# EAGLE board AAA_source-all_on_top (EAGLE 7.2.0)
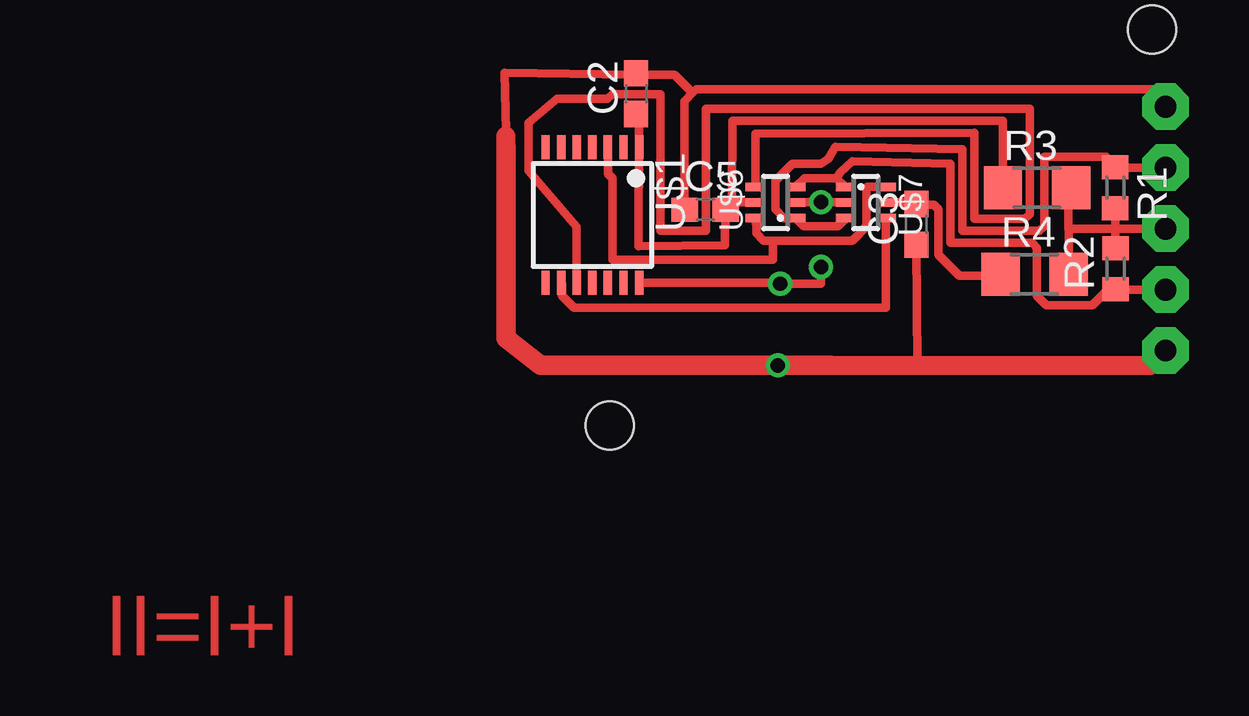
[diagram p0: board, top side]
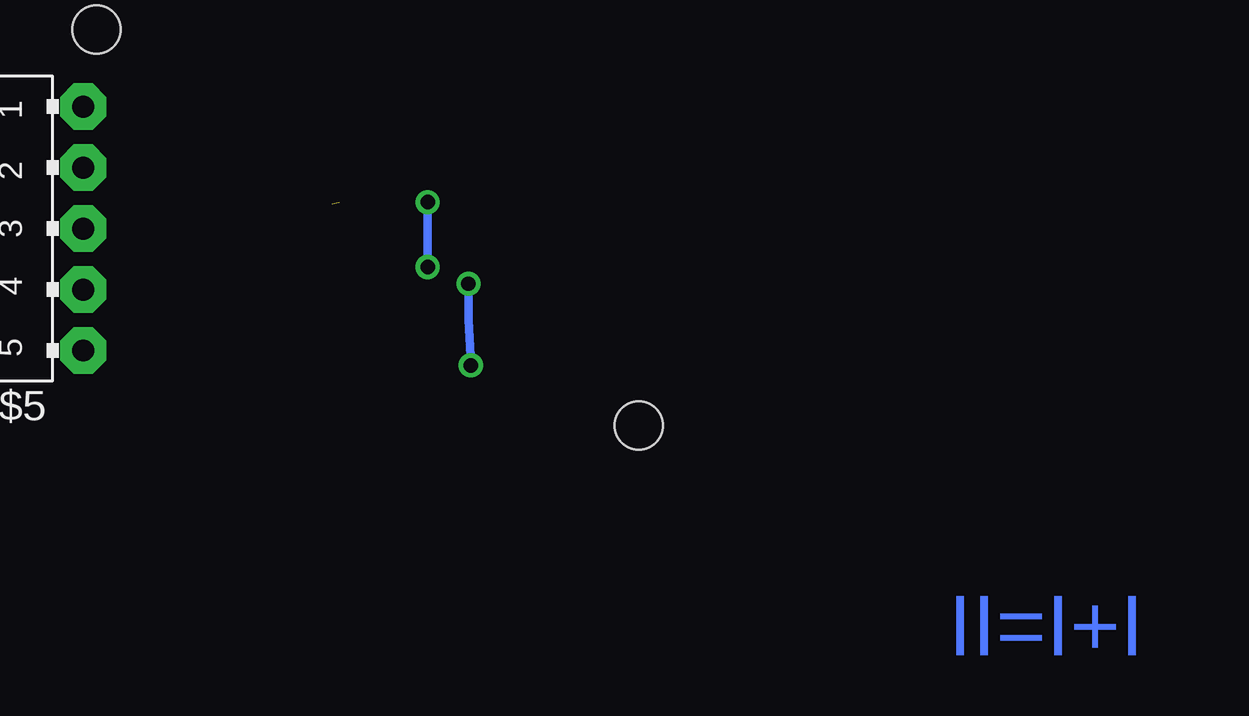
[diagram p1: board, bottom side, seen from below]

No outline drawn. Coordinates in mm, seen from the top.
Copper layers (1*16): Top 0.035mm / dielectric 1.5mm / Bottom 0.035mm
Design rules "default": minimum track width 10mil, minimum drill 24mil, track to track 8mil, track to pad 8mil, pad to pad 8mil, via to via 8mil, smd to smd 8mil, copper to edge 40mil, drill to drill 8mil, minimum pad ring 10mil, minimum via ring 8mil, stop-mask expansion 4mil, vias tented up to drill 0mil, thermal gap 10mil
Holes 2 mm at 21.9,2.3 44.5,18.8

## Footprints (pad centres in the part's own frame; a part is rotated, then mirrored left to right if it is on the bottom)
C0603 = smd 1.1 x 1: 1 -0.85,0; 2 0.85,0
R0603 = smd 1 x 1.1: 1 -0.85,0; 2 0.85,0
R1206 = smd 1.6 x 1.803: 1 -1.422,0; 2 1.422,0
TSSOP14 = smd 0.35 x 1: 1 -1.95,-2.825; 2 -1.3,-2.825; 3 -0.65,-2.825; 4 0,-2.825; 5 0.65,-2.825; 6 1.3,-2.825; 7 1.95,-2.825; 8 1.95,2.825; 9 1.3,2.825; 10 0.65,2.825; 11 0,2.825; 12 -0.65,2.825; 13 -1.3,2.825; 14 -1.95,2.825
JUMPER5F-90 = drill 0.914 pad 1.93 octagon: 1 5.08,-2.54; 2 2.54,-2.54; 3 0,-2.54; 4 -2.54,-2.54; 5 -5.08,-2.54
SC70-6L = smd 0.35 x 0.8: 1 -0.65,-0.85; 2 0,-0.85; 3 0.65,-0.85; 4 0.65,0.85; 5 0,0.85; 6 -0.65,0.85

## Placement (x,y rotation side)
C2  100nF  [C0603]  23,16.12 90 top
C3  100nF  [C0603]  34.67,10.68 90 top
C5  100nF  [C0603]  25.88,11.29 0 top
R1  4k7  [R0603]  42.96,12.2 270 top
R2  4k7  [R0603]  42.98,8.83 90 top
R3  [R1206]  39.7,12.2 0 top
R4  [R1206]  39.6,8.6 0 top
U$1  16F103-TSSOP  [TSSOP14]  21.17,11.06 180 top
U$5  JUMPER5F-90  [JUMPER5F-90]  47.6,10.5 90 bottom
U$6  NC7SB3157P6X  [SC70-6L]  28.81,11.59 90 top
U$7  NC7SB3157P6X  [SC70-6L]  32.56,11.59 270 top

## Library data of the parts
C2 C3 C5 R1-R4 = resistor
U$1 U$5-U$7 = !stavebnice03

## Nets
GND: C2.2 C3.1 C5.1 U$1.14 U$5.1 U$5.5 U$6.2 U$7.2
N$1: U$1.3 U$6.6 U$7.6
N$2: C2.1 C5.2 R3.1 U$1.1 U$6.5
N$3: C3.2 R4.1 U$7.5
N$4: U$1.9 U$7.4
N$6: R1.1 U$5.2 U$6.1 U$7.3
N$7: U$1.10 U$6.4
N$10: R2.1 U$5.4 U$6.3 U$7.1
VCC: R1.2 R2.2 R3.2 R4.2 U$5.3

## Tracks (layer width: path | path; a pad name or v marks a point on that pad's centre or on a via)
GND  (via drill 0.6)
  Top 0.357: 31.07,4.83 31.1,4.8 | U$7.2 30.01,11.59 v30.7,11.6 29.99,11.59 U$6.2 | 17.59,9.77 17.56,9.8 | 17.56,14.36 17.56,14.56 17.5,17 22.92,16.9 | 22.92,16.9 C2.2 | 22.92,16.9 24.6,16.9 25.35,16.15 | v30.7,8.9 30.7,8.2 v29,8.2 28.96,8.24 U$1.14 | C3.1 34.73,4.77 34.4,4.8 | U$5.1 45.06,15.74 44.5,16.3 25.5,16.3 25.35,16.15 | 25.35,16.15 25,15.8 25,11.31 C5.1
  Top 0.8: 17.56,13.9 17.56,14.36 | 31.1,4.8 34.4,4.8 44.44,4.8 U$5.5
  Top 0.813: 17.56,13.9 17.56,9.8 17.56,5.93 19,4.8 v28.9,4.8 31.1,4.8
  Bottom 0.357: v30.7,11.6 v30.7,8.9 | v28.9,4.8 29,6.7 v29,8.2
N$1
  Top 0.357: U$7.6 32.64,12.24 32.6,12.2 32.6,10.6 32,10 28.7,10 | 28,10.7 U$6.6 28,10.89 28,10.3 28.3,10 28.7,10 | U$1.3 21.82,12.78 22,12.6 22,9.2 28.7,9.2 28.7,10
N$2
  Top 0.357: U$1.1 23.12,14.6 | 23.12,14.6 23.12,15.15 C2.1 | 23.12,14.6 23.09,9.77 26.7,9.8 C5.2 27.03,11.59 U$6.5 26.99,11.59 27,15 38.28,15 R3.1
N$3  (1 unrouted)
  Top 0.357: R4.1 37.95,8.6 37.87,8.53 36.47,8.53 35.6,9.4 35.6,11.3 35.4,11.5 34.7,11.5 C3.2 | 34.39,11.59 U$7.5
N$4
  Top 0.357: U$7.4 33.41,10.59 33.4,7.2 20.4,7.2 19.9,7.7 19.9,8.21 U$1.9
N$6
  Top 0.357: U$7.3 31.71,10.91 31.4,10.6 30,10.6 U$6.1 29.16,10.94 28.8,11.3 28.8,12.5 29.5,13.2 30.7,13.2 31,13.4 31.3,13.9 36.6,13.8 36.6,10.4 39.8,10.4 40,10.6 40,13.5 42.6,13.5 42.96,13.04 R1.1 U$5.2
N$7
  Top 0.357: U$1.10 20.52,10.58 18.5,12.9 18.5,14.9 19.7,15.9 21.8,15.9 22,16.1 24,16.1 24,10.4 25.9,10.4 25.9,15.5 39.4,15.5 39.4,11.1 39.2,10.9 37.1,10.9 37.1,14.5 27.96,14.46 U$6.4
N$10
  Top 0.357: U$6.3 29.66,12.26 30,12.6 31.35,12.6 | 31.35,12.6 U$7.1 | U$5.4 42.99,7.96 R2.1 42.68,7.98 42,7.3 40.1,7.3 39.7,7.7 39.7,9.7 39.5,9.9 36.1,9.9 36.1,13.2 32,13.3 31.5,12.85 31.35,12.6
VCC
  Top 0.357: 43,10.5 U$5.3 | R2.2 42.98,10.48 43,10.5 | R1.2 42.96,10.54 43,10.5 | 43,10.5 41,10.5 | 41,10.5 41,11.48 R3.2 | R4.2 41.02,10.58 41,10.5

## Text on the board
Top: II=I+I
Bottom: II=I+I
Dimension: 5 pins - v2